# Altium PCB uSD_Module_TYPE2242.PcbDoc
Units mm, origin at the board's own origin, x right, y up, seen from the top; angles counter-clockwise.
Board outline 42 x 21.99 mm, 4 copper layers (Top Layer, Int1 (GND), Int2 (PWR), Bottom Layer), stack 0.77 mm thick; 10 components, 45 nets, 110 pads, 49 vias.
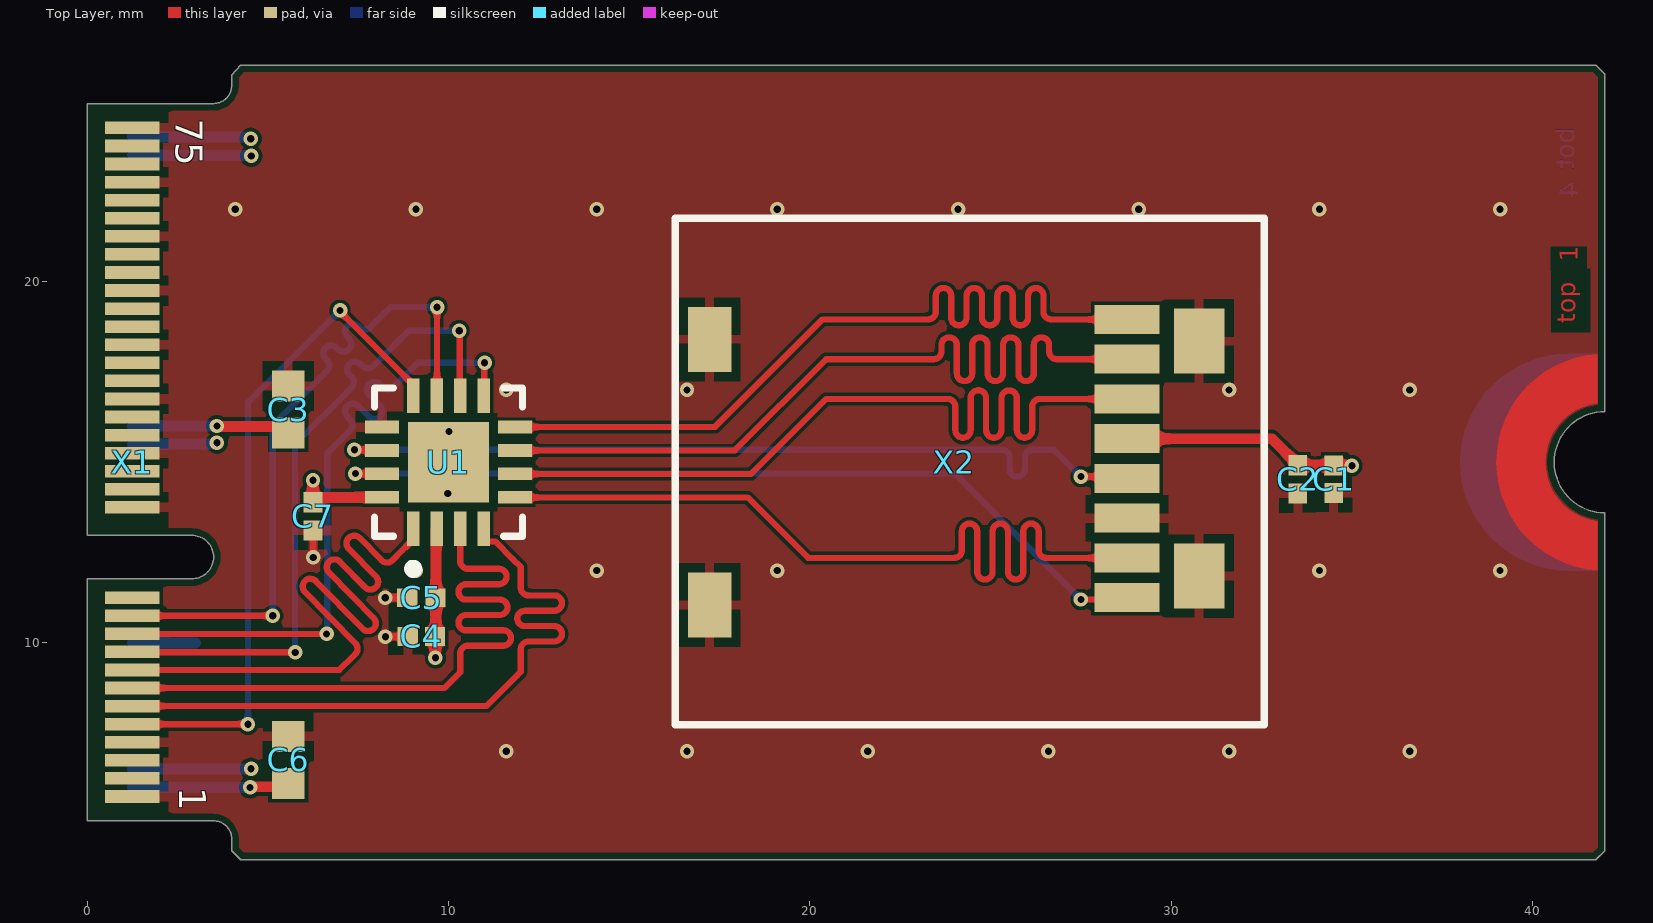
[diagram p0: Top Layer view]
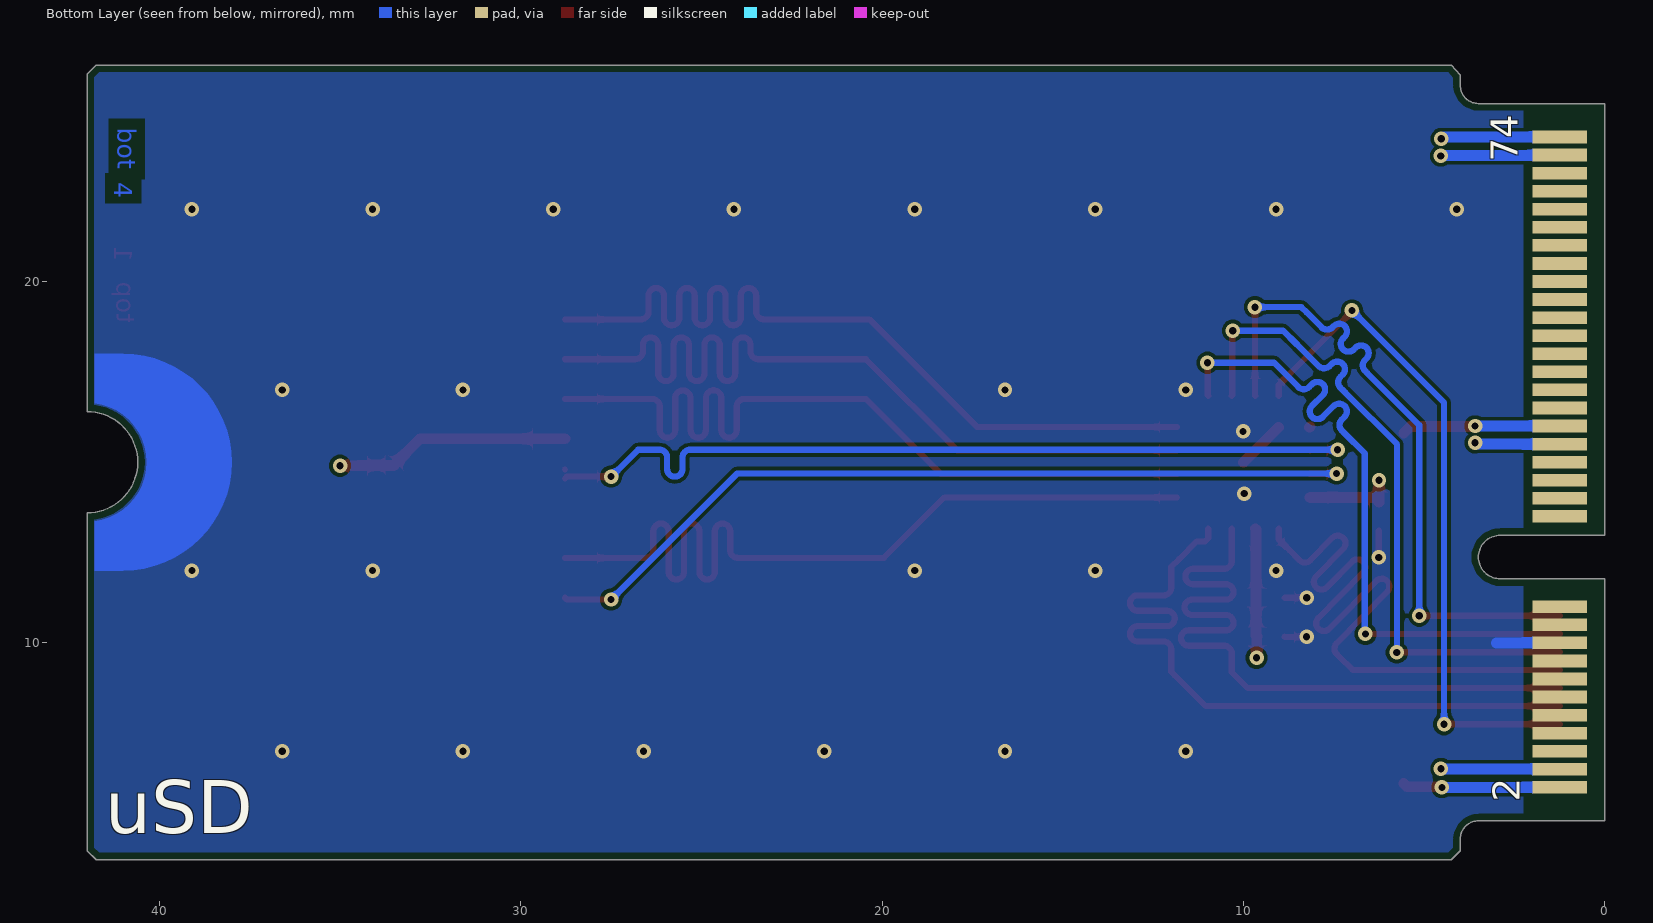
[diagram p1: Bottom Layer view, seen from below]
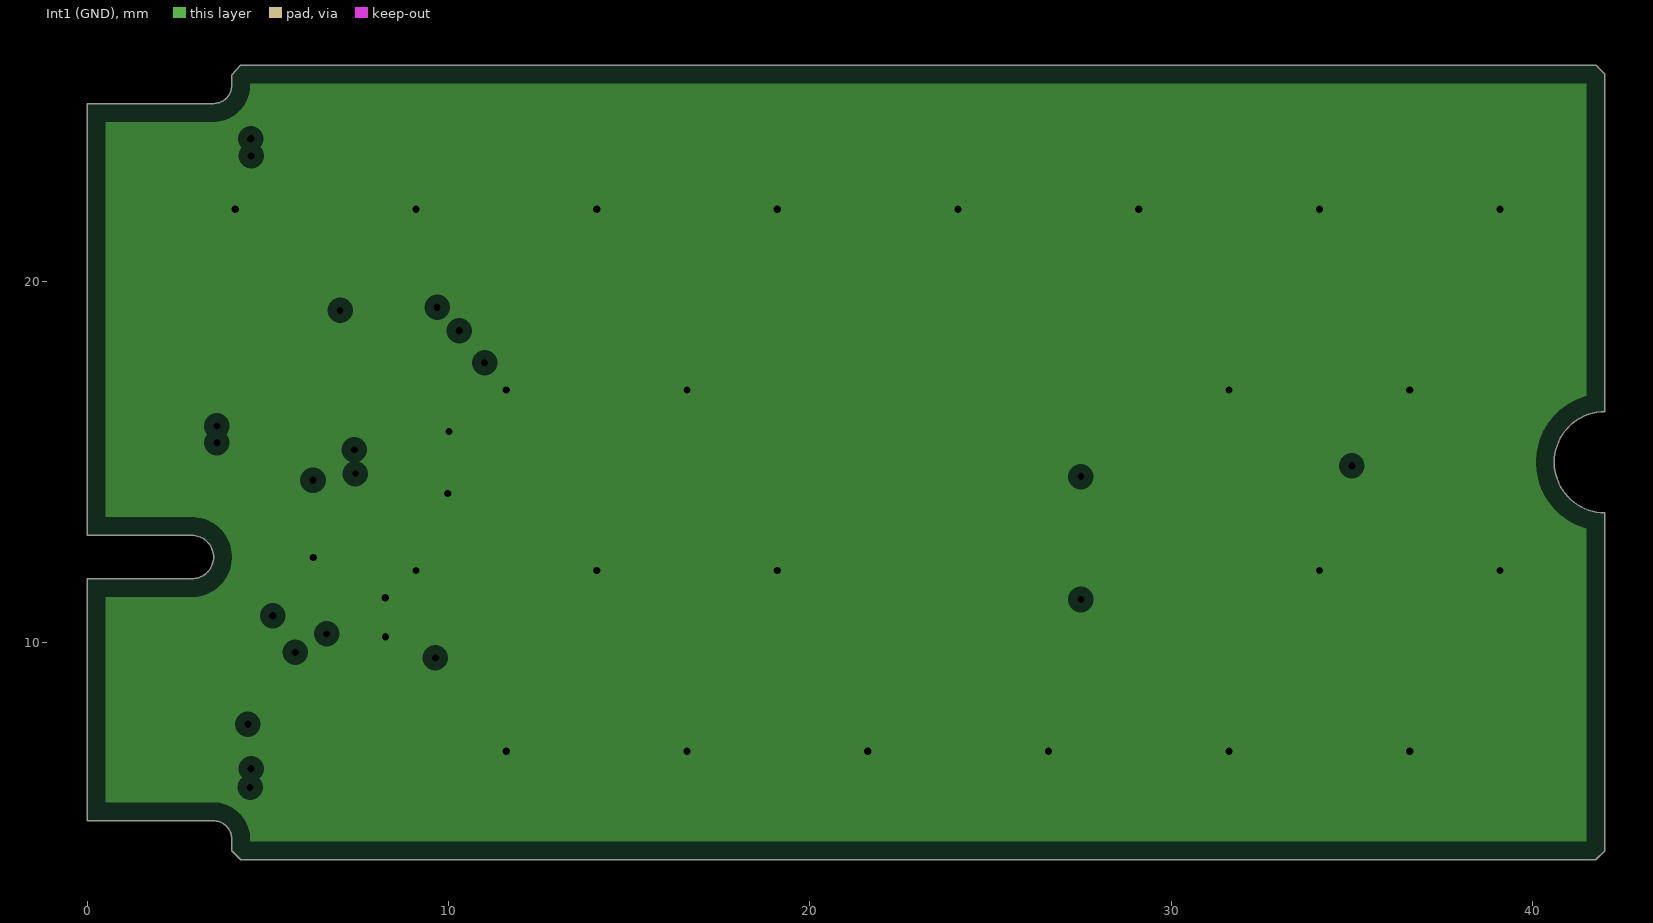
[diagram p2: Int1 (GND), clearances drawn from the general rule]
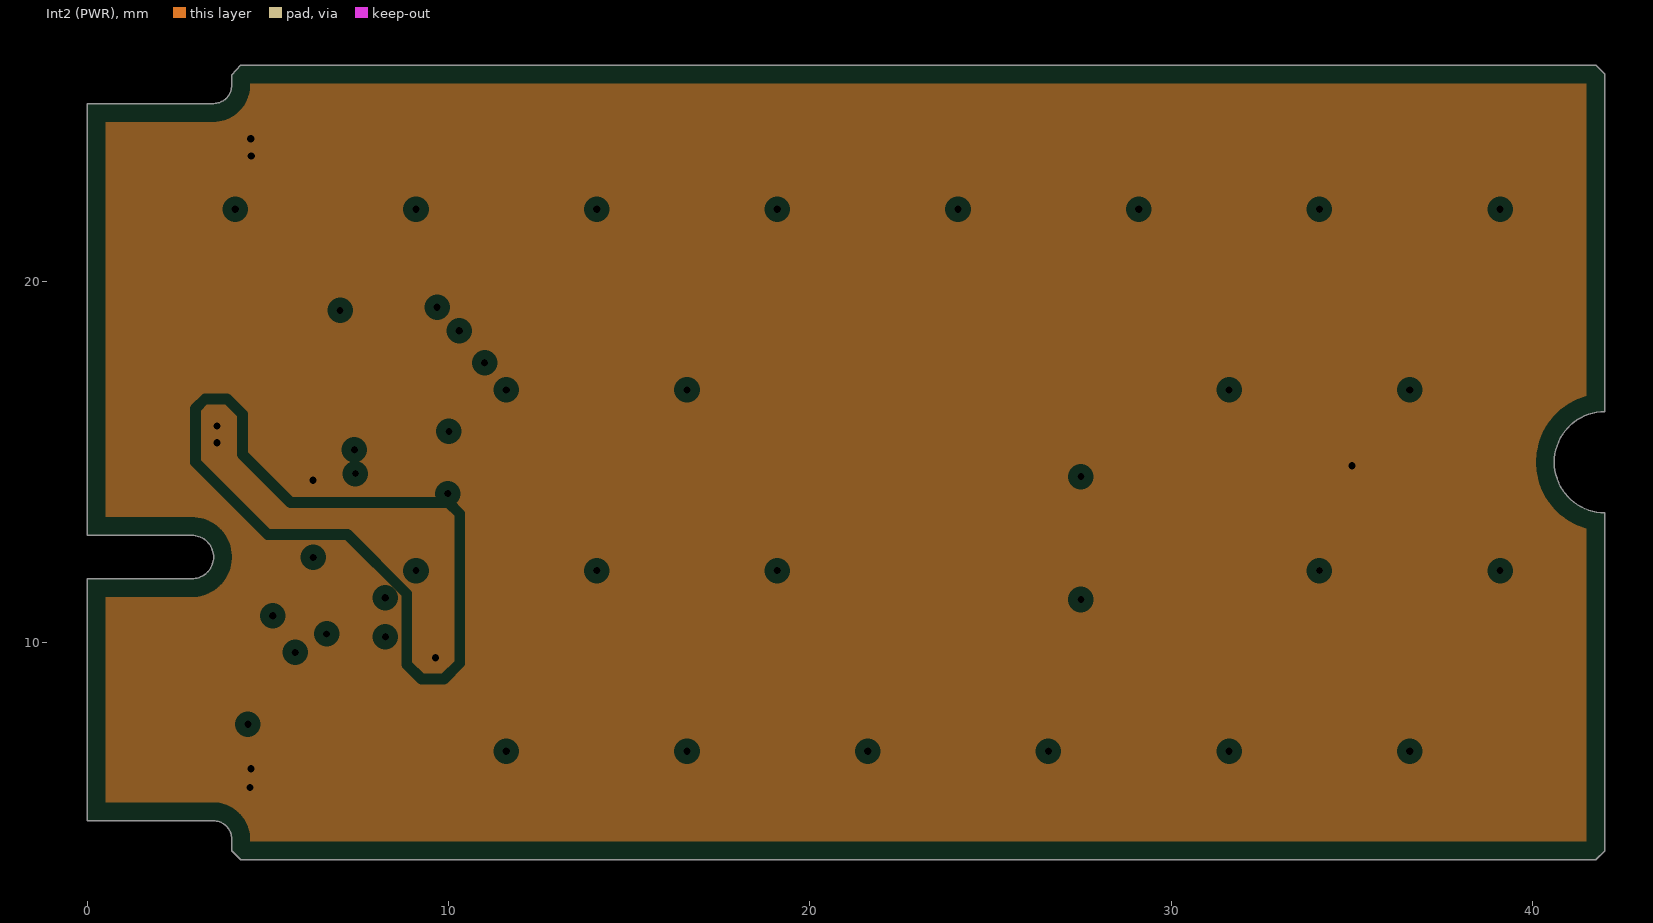
[diagram p3: Int2 (PWR), clearances drawn from the general rule]

## Layer stack, top to bottom
Top Solder: solder mask 0.0254, SM-001, Dk 4
Top Layer: signal copper 0.035
Dielectric 1: prepreg 0.1118, PP-015, Dk 4.3
Int1 (GND): plane copper 0.035, net GND
Dielectric 3: core 0.4064, Core-034, Dk 4.6
Int2 (PWR): plane copper 0.035, net 3V3
Dielectric 5: prepreg 0.1118, PP-015, Dk 4.3
Bottom Layer: signal copper 0.035
Bottom Solder: solder mask 0.0254, SM-001, Dk 4

## Board outline
4,4.25 4,4.575 ccw(c3.5,4.575) 3.5,5.075 0,5.075 0,11.775 2.9,11.775 ccw(c2.9,12.375) 3.5,12.375 ccw(c2.9,12.375) 2.9,12.975 0,12.975 0,24.925 3.5,24.925 ccw(c3.5,25.425) 4,25.425 4,25.713 4.25,25.988 41.75,25.988 42,25.738 42,16.4 ccw(c42,15) 40.6,15 ccw(c42,15) 42,13.6 42,4.25 41.75,4 4.25,4

## Design rules (kind name [scope] priority, off if disabled: settings)
BoardOutlineClearance [All] p1: gap=0.2 ignorepadtopadclearanceinfootprint=FALSE
Clearance [All] p1: gap=0.1 ignorepadtopadclearanceinfootprint=FALSE
DiffPairsRouting DiffPairsRouting_100R [InDifferentialPairClass('DP_100R')] p1: maxlimit=0.15 minlimit=0.15 mostfreqgap=0.15 toplayer_minwidth=0.11 toplayer_maxwidth=0.11 toplayer_prefwidth=0.11 bottomlayer_minwidth=0.11 bottomlayer_maxwidth=0.11 bottomlayer_prefwidth=0.11 impedanceprofiledriven=TRUE impedanceprofileid={D0ED966C-66EA-42B8-8657-787F2A77329B} impedanceprofilevalue=100.000000 maxuncoupledlength=12.7
DiffPairsRouting [All] p2: maxlimit=0.254 minlimit=0.254 mostfreqgap=0.254 toplayer_minwidth=0.381 toplayer_maxwidth=0.381 toplayer_prefwidth=0.381 bottomlayer_minwidth=0.381 bottomlayer_maxwidth=0.381 bottomlayer_prefwidth=0.381 maxuncoupledlength=12.7
MatchedLengths MatchedLengths_1 [InNetClass('S_GP2')] p1: tolerance=1 checknetsindiffpair=FALSE checkdiffpairvsdiffpair=TRUE checkxsignals=TRUE checkothers=TRUE
MatchedLengths [InNetClass('S_GP')] p2: tolerance=1 checknetsindiffpair=FALSE checkdiffpairvsdiffpair=TRUE checkxsignals=TRUE checkothers=TRUE
PlaneClearance [All] p1: clearance=0.254
PlaneConnect [All] p1: pad.planeconnectstyle=Relief pad.reliefexpansion=0.508 pad.reliefentries=4 pad.reliefconductorwidth=0.254 pad.reliefairgap=0.254 via.planeconnectstyle=Direct via.reliefexpansion=0.508 via.reliefentries=4 via.reliefconductorwidth=0.254 via.reliefairgap=0.254
PolygonConnect [All] p1: thpad.connectstyle=Relief thpad.reliefconductorwidth=0.254 thpad.reliefentries=4 thpad.polygonreliefangle="90 Angle" thpad.airgapwidth=0.254 smdpad.connectstyle=Relief smdpad.reliefconductorwidth=0.254 smdpad.reliefentries=4 smdpad.polygonreliefangle="90 Angle" smdpad.airgapwidth=0.254 via.connectstyle=Direct via.reliefconductorwidth=0.254 via.reliefentries=4 via.polygonreliefangle="90 Angle" via.airgapwidth=0.254
RoutingVias [All] p1: holewidth=0.2 width=0.4 viastyle="Through Hole" minholewidth=0.2 minwidth=0.4 maxholewidth=3 maxwidth=6
SolderMaskExpansion [All] p1: expansion=0.102 istentingtop=FALSE
Width Width_50R [InNetClass('SE_50R')] p1: maxlimit=0.172 minlimit=0.172 preferedwidth=0.172 impedanceprofiledriven=TRUE impedanceprofileid={CEA07893-88F1-4413-85C8-7467995CDE0A} impedanceprofilevalue=50.000000 minimp=50.000000 maximp=50.000000 favimp=50.000000
Width [All] p2: maxlimit=4 minlimit=0.1 preferedwidth=0.125
27 further rules are at their usual default settings.

## Classes and differential pairs
component class peripheral: C1 C2 C3 C4 C5 C6 C7 U1 X2
net class S_GP2: NetU1_5 NetU1_6 NetU1_7 NetU1_8 NetU1_14 NetU1_15
differential pair class DP_100R: FMC_GP_D1 FMC_GP_D2 FMC_GP_D3 FMC_GP_D4 FMC_GP_D5 FMC_GP_D6 FMC_GP_D7
net class SE_50R: FMC_GP_S0 FMC_GP_S1 FMC_GP_S2 FMC_GP_S3 FMC_GP_S4 FMC_GP_S5 FMC_GP_S6 NetU1_5 NetU1_6 NetU1_7 NetU1_8 NetU1_14 NetU1_15
net class S_GP: FMC_GP_S0 FMC_GP_S1 FMC_GP_S2 FMC_GP_S3 FMC_GP_S4 FMC_GP_S5 FMC_GP_S6
net class FMC_GP_S[0..7]: FMC_GP_S0 FMC_GP_S1 FMC_GP_S2 FMC_GP_S3 FMC_GP_S4 FMC_GP_S5 FMC_GP_S6 FMC_GP_S7
net class FMC_GP_D_P[0..7]: FMC_GP_D_P0 FMC_GP_D_P1 FMC_GP_D_P2 FMC_GP_D_P3 FMC_GP_D_P4 FMC_GP_D_P5 FMC_GP_D_P6 FMC_GP_D_P7
net class FMC_GP_D_N[0..7]: FMC_GP_D_N0 FMC_GP_D_N1 FMC_GP_D_N2 FMC_GP_D_N3 FMC_GP_D_N4 FMC_GP_D_N5 FMC_GP_D_N6 FMC_GP_D_N7
net class DP_GP: FMC_GP_D_N1 FMC_GP_D_N2 FMC_GP_D_N3 FMC_GP_D_N4 FMC_GP_D_N5 FMC_GP_D_N6 FMC_GP_D_N7 FMC_GP_D_P1 FMC_GP_D_P2 FMC_GP_D_P3 FMC_GP_D_P4 FMC_GP_D_P5 FMC_GP_D_P6 FMC_GP_D_P7
component class connector: X1
differential pair FMC_GP_D7: +FMC_GP_D_P7 -FMC_GP_D_N7
differential pair FMC_GP_D6: +FMC_GP_D_P6 -FMC_GP_D_N6
differential pair FMC_GP_D5: +FMC_GP_D_P5 -FMC_GP_D_N5
differential pair FMC_GP_D4: +FMC_GP_D_P4 -FMC_GP_D_N4
differential pair FMC_GP_D3: +FMC_GP_D_P3 -FMC_GP_D_N3
differential pair FMC_GP_D2: +FMC_GP_D_P2 -FMC_GP_D_N2
differential pair FMC_GP_D1: +FMC_GP_D_P1 -FMC_GP_D_N1

## Components (designator, comment, footprint, x,y, rotation, side; value= is the part's Value field where it differs from the comment)
C1 "1uF" CAPC1005X60X30LL05T10 34.5,14.525 r90 top
C2 "100nF" CAPC1050X55X23LL05T13 33.5,14.525 r90 top
C3 "10uF" CAPC1608X90X35LL15T15 5.565,16.457 r270 top
C4 "1uF" CAPC1005X60X30LL05T10 9.249,10.179 r0 top
C5 "100nF" CAPC1050X55X23LL05T13 9.25,11.25 r0 top
C6 "10uF" CAPC1608X90X35LL15T15 5.565,6.759 r270 top
C7 "100nF" CAPC1050X55X23LL05T13 6.25,13.5 r90 top
U1 "MAX13035EETE+" FP-T1644-4-MFG 10,15 r90 top
X1 "CONN PWR CARD EDGE PCB SLOT MALE" CON-67_0.5MM_PCB_SLOT 1.25,15 r270 top
X2 "ST1W008S4AR1500" ST1W008S4AR1500 24,15 r180 top

## Footprints (in the part's own frame and the unit in brackets; to place one, negate y for a bottom-side part, rotate by r counter-clockwise, add the part's x,y. Pads: shape width x height; smd on the part's side, far side on the other; paste and mask are expansions set on the pad)
CAPC1005X60X30LL05T10 [mm] "Chip Capacitor, 2-Leads, Body 1.00x0.50mm, IPC High Density"
  rect 0.56x0.52 smd: 1(-0.38,0) 2(0.38,0)
  body extent -0.53,-0.28 0.53,0.28, height 0.6
CAPC1050X55X23LL05T13 [mm] "Chip Capacitor, 2-Leads, Body 1.05x0.55mm, IPC High Density"
  rect 0.56x0.52 smd: 1(-0.39,0) 2(0.39,0)
  body extent -0.53,-0.28 0.53,0.28, height 0.55
CAPC1608X90X35LL15T15 [mm] "Chip Capacitor, 2-Leads, Body 1.60x0.81mm, IPC High Density"
  rect 0.85x0.9 smd: 1(-0.65,0) 2(0.65,0)
  body extent -0.88,-0.48 0.87,0.48, height 0.9
CON-67_0.5MM_PCB_SLOT [mm] "Connector 67, 0.5mm pitch - No BOM"
  rect 0.35x1.5 smd: 1(9.25,0) 3(8.75,0) 5(8.25,0) 7(7.75,0) 9(7.25,0) 11(6.75,0) 13(6.25,0) 15(5.75,0) 17(5.25,0) 19(4.75,0) 21(4.25,0) 23(3.75,0) 33(1.25,0) 35(0.75,0) 37(0.25,0) 39(-0.25,0) 41(-0.75,0) 43(-1.25,0) 45(-1.75,0) 47(-2.25,0) 49(-2.75,0) 51(-3.25,0) 53(-3.75,0) 55(-4.25,0) 57(-4.75,0) 59(-5.25,0) 61(-5.75,0) 63(-6.25,0) 65(-6.75,0) 67(-7.25,0) 69(-7.75,0) 71(-8.25,0) 73(-8.75,0) 75(-9.25,0)
  rect 0.35x1.5 smd far side: 2(9,0) 4(8.5,0) 6(8,0) 8(7.5,0) 10(7,0) 12(6.5,0) 14(6,0) 16(5.5,0) 18(5,0) 20(4.5,0) 22(4,0) 32(1.5,0) 34(1,0) 36(0.5,0) 38(0,0) 40(-0.5,0) 42(-1,0) 44(-1.5,0) 46(-2,0) 48(-2.5,0) 50(-3,0) 52(-3.5,0) 54(-4,0) 56(-4.5,0) 58(-5,0) 60(-5.5,0) 62(-6,0) 64(-6.5,0) 66(-7,0) 68(-7.5,0) 70(-8,0) 72(-8.5,0) 74(-9,0)
FP-T1644-4-MFG [mm]
  rect 0.95x0.35 smd paste+0 mask+0: 1(-1.84,0.975) 2(-1.84,0.325) 3(-1.84,-0.325) 4(-1.84,-0.975) 9(1.84,-0.975) 10(1.84,-0.325) 11(1.84,0.325) 12(1.84,0.975)
  rect 0.35x0.95 smd paste+0 mask+0: 5(-0.975,-1.84) 6(-0.325,-1.84) 7(0.325,-1.84) 8(0.975,-1.84) 13(0.975,1.84) 14(0.325,1.84) 15(-0.325,1.84) 16(-0.975,1.84)
  rect 2.23x2.23 smd paste+0 mask+0: 17(0,0)
  silkscreen extent -3.07,-2.05 2.05,2.05, body extent -2.41,-2.41 2.41,2.41, height 0.25
ST1W008S4AR1500 [mm] "CONN MICRO SD CARD HINGED TYPE"
  rect 1.8x0.8 smd: 1(-4.775,-3.95) 2(-4.775,-2.85) 3(-4.775,-1.75) 4(-4.775,-0.65) 5(-4.775,0.45) 6(-4.775,1.55) 7(-4.775,2.65) 8(-4.775,3.75)
  rect 1.2x1.8 smd: 9(6.775,-3.4) 10(6.775,3.95)
  rect 1.4x1.8 smd: 11(-6.775,-3.35) 12(-6.775,3.15)
  silkscreen extent -8.57,-6.75 7.73,7.27, body extent -8.57,-6.75 7.73,7.3, height 1.91

## Part data
C1 C4: library part CMP-2008-02044-1, Case Code (Imperial)=0402, Dielectric=X5R, Dielectric Material=Ceramic, Manufacturer=Kemet, Manufacturer Part Number=C0402C105K9PACTU, Max Operating Temperature=85°C, Min Operating Temperature=-55°C, Package Quantity=1, Supplier Part Number 1=399-4873-6-ND, Tolerance=10%, Voltage=6.3V, Case/Package=0402, Category="Ceramic Capacitors", ComponentLink1Description=https://datasheet.ciiva.com/28645/1789732-28645392.pdf?src-supplier=Element14, ComponentLink1URL=https://datasheet.ciiva.com/28645/1789732-28645392.pdf?src-supplier=Element14, ComponentLink2Description=https://datasheet.ciiva.com/11786/0900766b8116eb59-11786028.pdf?src-supplier=RSComponents, ComponentLink2URL=https://datasheet.ciiva.com/11786/0900766b8116eb59-11786028.pdf?src-supplier=RSComponents, ComponentLink3Description=https://datasheet.ciiva.com/7747/kem-c1006-x5r-smd-7747445.pdf?src-supplier=Element14, ComponentLink3URL=https://datasheet.ciiva.com/7747/kem-c1006-x5r-smd-7747445.pdf?src-supplier=Element14, ComponentLink4Description=https://datasheet.ciiva.com/7747/40889-7747623.pdf?src-supplier=Element14, ComponentLink4URL=https://datasheet.ciiva.com/7747/40889-7747623.pdf?src-supplier=Element14, ComponentLink5Description=https://datasheet.ciiva.com/18192/getdatasheetpartid-127800-18192427.pdf?src-supplier=Verical, ComponentLink5URL=https://datasheet.ciiva.com/18192/getdatasheetpartid-127800-18192427.pdf?src-supplier=Verical, Depth=0.5mm, Height=0.5mm, Lead Free="Lead Free", Lead Pitch=0.3mm, Length=1mm, Mount="Surface Mount", Number of Pins=2, Packaging="Tape and Reel", Part Number=C0402C105K9PACTU, Pricing 1="1=0.10000, 10=0.02600, 100=0.01180, 500=0.00844, 1000=0.00662, 2500=0.00602, 5000=0.00554 (USD)", Radiation Hardening=No, REACH SVHC="No SVHC", RoHS=Yes, Stock 1=1737568, Supplier 1=Digi-Key, Termination=SMD/SMT, Thickness=0.022inch, Voltage Rating=6.3V, Voltage Rating (DC)=6.3V, Width=0.02inch
C2 C5 C7: library part CMP-2000-05439-1, "Chip Capacitor, 100 nF, +/- 10%, 16 V, -55 to 125 degC, 0402 (1005 Metric), RoHS, Tape and Reel", Case Code (Imperial)=0402, Case Code (Metric)=1005, Dielectric=X7R, Manufacturer="Samsung Electro-Mechanics", Manufacturer Part Number=CL05B104KO5NNNC, Max Operating Temperature=125°C, Min Operating Temperature=-55°C, Package Quantity=1, Rated Voltage=16V, Supplier Part Number 1=1276-1001-1-ND, Tolerance=10%, Tolerance (%)=±10%, Case Size/Dimension=0402, Case/Package=0402, Category="Ceramic Capacitors", ComponentLink1Description=https://datasheet.ciiva.com/26920/getdatasheetpartid-359683-26920169.pdf?src-supplier=Verical, ComponentLink1URL=https://datasheet.ciiva.com/26920/getdatasheetpartid-359683-26920169.pdf?src-supplier=Verical, ComponentLink2Description=https://datasheet.ciiva.com/29198/458718-da-01-en-vs-kondensator-0402-29198423.pdf?src-supplier=Conrad, ComponentLink2URL=https://datasheet.ciiva.com/29198/458718-da-01-en-vs-kondensator-0402-29198423.pdf?src-supplier=Conrad, ComponentLink3Description=https://datasheet.ciiva.com/16208/cl05b104kq5nnnc-16208343.pdf?src-supplier=Future+Electronics, ComponentLink3URL=https://datasheet.ciiva.com/16208/cl05b104kq5nnnc-16208343.pdf?src-supplier=Future+Electronics, ComponentLink4Description=https://datasheet.ciiva.com/26309/mlcc-catalogdownload2013-eng-26309003.pdf?src-supplier=Distrelec, ComponentLink4URL=https://datasheet.ciiva.com/26309/mlcc-catalogdownload2013-eng-26309003.pdf?src-supplier=Distrelec, Contact Plating=Tin, Datasheet URL=https://datasheet.ciiva.com/29198/458718-da-01-en-vs-kondensator-0402-29198423.pdf, Datasheet Version=Nov-10, Depth=0.5mm, Height=0.5mm, Lead Free="Lead Free", Length=1mm, Manufacturer URL=http://www.samsungsem.com/global/index.jsp, Material=Ceramic, Mount="Surface Mount", Packaging="Tape and Reel", Pricing 1="1=0.10000, 10=0.02800, 50=0.01520, 100=0.01240, 500=0.00886, 1000=0.00696, 2500=0.00632, 5000=0.00582 (USD)", Radiation Hardening=No, RoHS=Yes, Stock 1=18886859, Supplier 1=Digi-Key, Thickness=0.022inch, Voltage=16V, Voltage Rating=16V, Voltage Rating (DC)=16V, Width=0.02inch
C3 C6: library part CMP-2006-04476-1, Case Code (Imperial)=0603, Case Code (Metric)=1608, Dielectric=X5R, Dielectric Material=Ceramic, Manufacturer="AVX Interconnect / Elco", Manufacturer Part Number=06036D106MAT2A, Max Operating Temperature=85°C, Min Operating Temperature=-55°C, Package Quantity=1, Supplier Part Number 1=478-5318-1-ND, Tolerance=20%, Voltage=6.3V, Case/Package=0603, Category="Ceramic Capacitors", ComponentLink1Description=https://datasheet.ciiva.com/153/cx5r-153301.pdf?src-supplier=Digi-Key, ComponentLink1URL=https://datasheet.ciiva.com/153/cx5r-153301.pdf?src-supplier=Digi-Key, ComponentLink2Description=https://datasheet.ciiva.com/1458/1796776-1458117.pdf?src-supplier=Element14, ComponentLink2URL=https://datasheet.ciiva.com/1458/1796776-1458117.pdf?src-supplier=Element14, ComponentLink3Description=https://datasheet.ciiva.com/153/cx5r-153302.pdf?src-supplier=Digi-Key, ComponentLink3URL=https://datasheet.ciiva.com/153/cx5r-153302.pdf?src-supplier=Digi-Key, ComponentLink4Description=https://datasheet.ciiva.com/153/cx5r-153303.pdf?src-supplier=Digi-Key, ComponentLink4URL=https://datasheet.ciiva.com/153/cx5r-153303.pdf?src-supplier=Digi-Key, ComponentLink5Description=https://datasheet.ciiva.com/5422/cx5r-33896-5422935.pdf?src-supplier=Mouser, ComponentLink5URL=https://datasheet.ciiva.com/5422/cx5r-33896-5422935.pdf?src-supplier=Mouser, ComponentLink6Description=https://datasheet.ciiva.com/16538/cx5r-16538025.pdf?src-supplier=Avnet+Asia, ComponentLink6URL=https://datasheet.ciiva.com/16538/cx5r-16538025.pdf?src-supplier=Avnet+Asia, ComponentLink7Description=https://datasheet.ciiva.com/2987/cx5r-2987866.pdf?src-supplier=Avnet, ComponentLink7URL=https://datasheet.ciiva.com/2987/cx5r-2987866.pdf?src-supplier=Avnet, ComponentLink8Description=https://datasheet.ciiva.com/14591/70001028-14591754.pdf?src-supplier=Allied+Electronics, ComponentLink8URL=https://datasheet.ciiva.com/14591/70001028-14591754.pdf?src-supplier=Allied+Electronics, ComponentLink9Description=https://datasheet.ciiva.com/2987/cx5r-2987867.pdf?src-supplier=Avnet, ComponentLink9URL=https://datasheet.ciiva.com/2987/cx5r-2987867.pdf?src-supplier=Avnet, ComponentLink10Description=https://datasheet.ciiva.com/16201/cx5r-16201627.pdf?src-supplier=Future+Electronics, ComponentLink10URL=https://datasheet.ciiva.com/16201/cx5r-16201627.pdf?src-supplier=Future+Electronics, Construction=Flat, Contact Plating=Tin,Matte, Depth=0.81mm, Height=0.9mm, Lead Free="Lead Free", Length=1.6mm, Mount="Surface Mount,PCB", Number of Pins=2, Packaging="Tape and Reel", Part Number=06036D106MAT2A, Pricing 1="1=0.24000, 10=0.16500, 50=0.09900, 100=0.08360, 500=0.05720, 1000=0.05060 (USD)", Radiation Hardening=No, REACH SVHC="No SVHC", RoHS=Yes, RoHS Compliant=Yes, Series=-, Stock 1=1934840, Supplier 1=Digi-Key, Termination=SMD/SMT, Thickness=0.035inch, Voltage Rating=6.3V, Voltage Rating (DC)=6.3V, Width=0.032inch
U1: library part CMP-05703-000003-1, "IC TRNSLTR BIDIRECTIONAL 16TQFN", High Level Output Current=-20uA, Low Level Output Current=20uA, Manufacturer=Maxim, Max Junction Temp=+150°C, Max Operating Temperature=85°C, Max Power Dissipation=2W, Max Supply Voltage=3.6V, Min Operating Temperature=-40°C, Min Supply Voltage=1.62V, Nominal Supply Current=6-16uA, Package=T1644-4, Package Quantity=75, Supplier Part Number 1=MAX13035EETE+-ND, Supply Current=2uA, Temperature="-40°C to +85°C", Temperature Range High=+85°C, Automotive=No, Category=IC, ComponentLink1Description=https://datasheet.ciiva.com/1901/max13030e-max13035e-1901479.pdf?src-supplier=Digi-Key, ComponentLink1URL=https://datasheet.ciiva.com/1901/max13030e-max13035e-1901479.pdf?src-supplier=Digi-Key, ComponentLink2Description=Datasheet, ComponentLink2URL=https://datasheets.maximintegrated.com/en/ds/MAX13030E-MAX13035E.pdf, ComponentLink3Description=https://datasheet.ciiva.com/17370/max13030e-max13035e-17370199.pdf?src-supplier=Avnet+Europe, ComponentLink3URL=https://datasheet.ciiva.com/17370/max13030e-max13035e-17370199.pdf?src-supplier=Avnet+Europe, ComponentLink4Description=https://datasheet.ciiva.com/14287/max13030e-max13035e-14287387.pdf?src-supplier=Avnet, ComponentLink4URL=https://datasheet.ciiva.com/14287/max13030e-max13035e-14287387.pdf?src-supplier=Avnet, Data Rate=100Mbits/s, Device Class L1="Integrated Circuits (ICs)", Device Class L2="Logic ICs", Device Class L3="Voltage Level Shifters", Digikey Description="IC TRNSLTR BIDIRECTIONAL 16TQFN", Footprint Url=https://pdfserv.maximintegrated.com/land_patterns/90-0070.PDF, Height=0.8mm, Ipc Land Pattern Name=QFN65P400X400X75-16, Lead Free=Yes, Length=4mm, Logic Function=Translator, Logic Function Desc=Non-Inverting, Manufacturer Part Number=MAX13035EETE+, Mount="Surface Mount", Mouser Description="Translation - Voltage Levels 6Ch High-Speed", Number of Bits=6, Number of Channels=6, Number of Circuits=1, Number Of Inputs=6, Number Of Outputs=6, Number of Pins=16, Octopart=https://octopart.com/max13035eete%2B-maxim+integrated-39866737, Packaging=Rail/Tube, Pricing 1="1=9.01000, 10=8.13600, 25=7.75760, 100=6.73590, 250=6.43312, 500=5.86552, 1000=5.10867, 2500=4.91946, 5000=4.81950 (USD)", Propagation Delay=6.5ns, Radiation Hardening=No, REACH SVHC=Unknown, RoHS=TRUE, RoHS Compliant=Yes, Series=-, Standoff Height=0mm, Stock 1=1404, Supplier 1=Digi-Key, Temperature Range Low=-40°C, Turn-On Delay Time=6.5ns, V A Max=3.6V, V A Min=2.2V, V B Max=3.2V, V B Min=1.62V, Width=4mm
X1: library part CMP-01224-1, "Mates with 2199119-4 - No BOM", Card Thickness=0.8mm, Card Type="Non Specified - Dual Edge", Gender=Male, Mates with=2199119-4, Number of Positions=67, Pitch=0.5mm
X2: library part CMP-00689-1, "Memory Card Connectors MICRO SD HINGE TYPE OPEN on cover", Current Rating=500mA, Manufacturer="JAE Electronics", Package Quantity=1500, Supplier Part Number=670-2921-1-ND, Voltage Rating=10V, ComponentLink1Description=cardconn-microsd-pg-v2-2-6934295.pdf, ComponentLink1URL=https://datasheet.ciiva.com/6934/cardconn-microsd-pg-v2-2-6934295.pdf, Connector Type=Connector, Contact Material="Copper Alloy", Contact Plating=Gold, Gender=Female, Height=2mm, Housing Material=Resin, Lead Free="Lead Free", Manufacturer Part Number=ST1W008S4AR1500, Mating Cycles=10000, Mount="Surface Mount", Number of Contacts=8, Number of Positions=8, Number of Rows=1, Orientation="Right Angle", Packaging="Tape and Reel", Pitch=1.1mm, Supplier=Digi-Key, Termination=SMD/SMT

## Via types
v1: diameter 0.4, hole 0.2, Top Layer to Bottom Layer, tented both sides, 49 vias

## Nets (pads, with @x,y where several pads share a name; then routed paths per layer and width w, separated by ;. In a path a pad name is that pad's centre, name@x,y a point inside that pad or via, vN(x,y) a via of type N, cw(c..) or ccw(c..) an arc to the next point about the centre after c; other vN are vias at no path point)
3V3: C1.2 C2.2 C6.2 C7.2 U1.16 X1.2 X1.4 X1.72 X1.74 X2.4 | length 23.3
  Top Layer w0.3: v1(4.511,6) 4.53,6.019 5.475,6.019 C6.2 ; C7.2 C7.2@6.25,14.025 ; v1(6.25,14.5) C7.2@6.25,14.025 ; U1.16 C7.2@6.25,14.025 ; X2.4 32.785,15.65 33.5,14.935 C2.2 33.505,14.91 34.495,14.91 C1.2 34.502,14.903 34.998,14.903 v1(35,14.9)
  Bottom Layer w0.3: X1.4 1.26,6.51 4.527,6.51 v1(4.536,6.519) ; X1.72 1.262,23.488 4.53,23.488 v1(4.543,23.475) ; X1.74 4.451,24 4.498,23.952 v1(4.526,23.952) ; X1.2 v1(4.511,6)
FMC_12V: X1.38
FMC_ADJ: C3.2 C4.2 C5.2 U1.2 X1.40 X1.42 | length 10.4
  Top Layer w0.3: v1(3.593,16.001) 3.607,15.987 5.386,15.987 C3.2 ; v1(9.639,9.586) 9.634,9.59 9.634,10.174 C4.2 9.652,10.202 9.652,13.137 U1.2
  Bottom Layer w0.3: X1.40 3.529,15.5 3.566,15.537 v1(3.593,15.537) ; X1.42@1.251,16.001 v1@3.592,16.001
FMC_GP_D_N0: X1.5
FMC_GP_D_N1: X1.37
FMC_GP_D_N2: X1.43
FMC_GP_D_N3: X1.49
FMC_GP_D_N4: X1.55
FMC_GP_D_N5: X1.61
FMC_GP_D_N6: X1.67
FMC_GP_D_N7: X1.73
FMC_GP_D_P0: X1.3
FMC_GP_D_P1: X1.35
FMC_GP_D_P2: X1.41
FMC_GP_D_P3: X1.47
FMC_GP_D_P4: X1.53
FMC_GP_D_P5: X1.59
FMC_GP_D_P6: X1.65
FMC_GP_D_P7: X1.71
FMC_GP_S0: U1.12 X1.9 | length 18.9
  Top Layer w0.172: X1.9 v1(4.449,7.75) ; v1(7,19.2) 7,19.165 9.025,17.14 U1.12
  Bottom Layer w0.172: v1(4.449,7.75) 4.449,16.649 v1(7,19.2)
FMC_GP_S1: U1.4 X1.11 | length 19.7
  Top Layer w0.172: X1.11 11.05,8.25 11.9,9.1 12,9.2 12,9.824 cw(c12.213,9.824) 12.213,10.037 12.926,10.037 ccw(c12.926,10.25) 12.926,10.463 12.115,10.463 cw(c12.115,10.676) 12.115,10.889 12.926,10.889 ccw(c12.926,11.101) 12.926,11.314 12.213,11.314 cw(c12.213,11.527) 12,11.527 12,12.1 11.781,12.319 11.293,12.807 11.064,12.807 10.975,12.896 U1.4
FMC_GP_S2: U1.3 X1.13 | length 20.3
  Top Layer w0.172: X1.13 7,8.75 9.5,8.75 9.888,8.75 10.325,9.187 10.325,9.196 10.325,9.708 cw(c10.538,9.708) 10.538,9.921 11.516,9.921 ccw(c11.516,10.134) 11.516,10.347 10.487,10.347 cw(c10.487,10.559) 10.487,10.772 11.419,10.772 ccw(c11.419,10.985) 11.419,11.198 10.487,11.198 cw(c10.487,11.411) 10.487,11.624 11.397,11.624 ccw(c11.397,11.836) 11.397,12.049 10.538,12.049 cw(c10.538,12.262) 10.325,12.262 10.325,12.585 U1.3
FMC_GP_S3: U1.1 X1.15 | length 20
  Top Layer w0.172: X1.15 6.982,9.25 7.359,9.627 7.421,9.689 ccw(c7.271,9.839) 7.422,9.988 6.024,11.412 cw(c6.176,11.561) 6.027,11.713 cw(c6.176,11.561) 6.328,11.71 7.625,10.389 ccw(c7.777,10.539) 7.926,10.387 ccw(c7.777,10.539) 7.929,10.688 6.692,11.948 cw(c6.843,12.097) 6.694,12.249 cw(c6.843,12.097) 6.995,12.246 7.689,11.54 ccw(c7.841,11.689) 7.99,11.537 ccw(c7.841,11.689) 7.992,11.838 7.239,12.605 cw(c7.391,12.754) 7.242,12.906 cw(c7.391,12.754) 7.543,12.903 8.148,12.287 ccw(c8.3,12.436) 8.451,12.286 8.725,12.56 9.025,12.86 U1.1
FMC_GP_S4: U1.10 X1.17 | length 18.6
  Top Layer w0.172: X1.17 1.257,9.743 5.75,9.743 v1(5.757,9.736) ; v1(10.295,18.639) 10.31,18.624 10.31,16.855 U1.10
  Bottom Layer w0.172: v1(5.757,9.736) 5.75,9.743 5.75,15.49 7.186,16.926 7.247,16.986 7.319,17.058 ccw(c7.168,17.209) 7.316,17.362 7.259,17.417 cw(c7.406,17.571) 7.253,17.718 cw(c7.406,17.571) 7.554,17.724 7.624,17.657 ccw(c7.771,17.81) 7.922,17.66 8.473,18.21 8.534,18.271 8.903,18.639 v1(10.295,18.639)
FMC_GP_S5: U1.9 X1.19 | length 18.7
  Top Layer w0.172: X1.19 1.251,10.249 v1(6.627,10.248) v1(6.627,10.248) ; U1.9 10.988,16.853 10.988,17.738 v1(11,17.75)
  Bottom Layer w0.172: v1(6.627,10.248) 6.644,10.265 6.644,15.242 7.219,15.816 7.28,15.877 ccw(c7.129,16.028) 7.28,16.178 7.202,16.256 cw(c7.352,16.407) 7.202,16.557 cw(c7.352,16.407) 7.503,16.557 7.806,16.254 ccw(c7.957,16.404) 8.107,16.254 ccw(c7.957,16.404) 8.107,16.555 7.804,16.858 cw(c7.954,17.009) 7.804,17.159 cw(c7.954,17.009) 8.105,17.159 8.183,17.081 ccw(c8.333,17.232) 8.484,17.081 9.152,17.75 v1(11,17.75)
FMC_GP_S6: U1.11 X1.21 | length 18.8
  Top Layer w0.172: X1.21 v1(5.136,10.75) v1@5.136,10.812 ; U1.11 9.68,16.845 9.68,19.285 v1(9.686,19.29)
  Bottom Layer w0.172: v1(5.136,10.75) 5.136,16.026 6.576,17.467 6.637,17.527 ccw(c6.486,17.678) 6.637,17.828 6.597,17.868 cw(c6.748,18.018) 6.597,18.169 cw(c6.748,18.018) 6.898,18.169 6.946,18.121 ccw(c7.096,18.272) 7.247,18.121 ccw(c7.096,18.272) 7.247,18.422 7.199,18.47 cw(c7.35,18.62) 7.199,18.771 cw(c7.35,18.62) 7.5,18.771 7.54,18.731 ccw(c7.69,18.882) 7.841,18.731 8.255,19.145 8.4,19.29 v1(9.686,19.29)
FMC_GP_S7: X1.23
GND: C1.1 C2.1 C3.1 C4.1 C5.1 C6.1 C7.1 U1.13 U1.17 X1.1 X1.7 X1.18 X1.33 X1.39 X1.45 X1.51 X1.57 X1.63 X1.69 X1.75 X2.6 X2.9 X2.10 X2.11 X2.12 | length 5.1
  Top Layer w0.172: C7.1 6.258,13.102 v1(6.258,12.364) ; v1(8.25,11.25) C5.1 ; v1(8.254,10.166) 8.857,10.166 C4.1
  Top Layer w0.3: U1.13 U1.13@8.17,15.965 ; U1.17@9.035,15.965 U1.17
  Bottom Layer w0.3: X1.18 3,10
  other v1: 11.6,7 16.6,7 21.6,7 26.6,7 31.6,7 36.6,7 9.1,12 14.1,12 19.1,12 34.1,12 39.1,12 9.979,14.131 10.012,15.851 11.6,17 16.6,17 31.6,17 36.6,17 4.1,22 9.1,22 14.1,22 19.1,22 24.1,22 29.1,22 34.1,22 39.1,22
I2C_SCL: X1.60
I2C_SDA: X1.58
I2S_CLK: X1.8
I2S_IN: X1.14
I2S_OUT: X1.12
I2S_WS: X1.10
nALERT: X1.62
NetU1_5: U1.5 X2.7 | length 24.6
  Top Layer w0.172: U1.5 18.275,14.025 19.95,12.35 23.906,12.35 23.992,12.35 ccw(c23.992,12.563) 24.205,12.563 24.205,13.087 cw(c24.418,13.087) 24.63,13.087 24.63,11.965 ccw(c24.843,11.965) 25.056,11.965 25.056,13.087 cw(c25.269,13.087) 25.482,13.087 25.482,11.965 ccw(c25.695,11.965) 25.907,11.965 25.907,13.087 cw(c26.12,13.087) 26.333,13.087 26.333,12.563 ccw(c26.546,12.563) 26.546,12.35 27.2,12.35 X2.7
NetU1_6: U1.6 X2.3 | length 24.1
  Top Layer w0.172: U1.6 18.375,14.675 20.45,16.75 23.3,16.75 23.812,16.75 cw(c23.812,16.537) 24.024,16.537 24.024,15.888 ccw(c24.237,15.888) 24.45,15.888 24.45,16.778 cw(c24.663,16.778) 24.876,16.778 24.876,15.888 ccw(c25.089,15.888) 25.301,15.888 25.301,16.772 cw(c25.514,16.772) 25.727,16.772 25.727,15.888 ccw(c25.94,15.888) 26.153,15.888 26.153,16.537 cw(c26.366,16.537) 26.366,16.75 27.1,16.75 X2.3
NetU1_7: U1.7 X2.2 | length 25
  Top Layer w0.172: U1.7 17.925,15.325 20.45,17.85 23.343,17.85 23.429,17.85 ccw(c23.429,18.063) 23.642,18.063 23.642,18.241 cw(c23.854,18.241) 24.067,18.241 24.067,17.456 ccw(c24.28,17.456) 24.493,17.456 24.493,18.241 cw(c24.706,18.241) 24.919,18.241 24.919,17.456 ccw(c25.131,17.456) 25.344,17.456 25.344,18.241 cw(c25.557,18.241) 25.77,18.241 25.77,17.456 ccw(c25.983,17.456) 26.196,17.456 26.196,18.241 cw(c26.408,18.241) 26.621,18.241 26.621,18.063 ccw(c26.834,18.063) 26.834,17.85 27.2,17.85 X2.2
NetU1_8: U1.8 X2.1 | length 24.6
  Top Layer w0.172: U1.8 17.375,15.975 20.35,18.95 23.186,18.95 23.272,18.95 ccw(c23.272,19.163) 23.485,19.163 23.485,19.608 cw(c23.697,19.608) 23.91,19.608 23.91,19 ccw(c24.123,19) 24.336,19 24.336,19.608 cw(c24.549,19.608) 24.762,19.608 24.762,19 ccw(c24.974,19) 25.187,19 25.187,19.608 cw(c25.4,19.608) 25.613,19.608 25.613,19 ccw(c25.826,19) 26.039,19 26.039,19.608 cw(c26.251,19.608) 26.464,19.608 26.464,19.163 ccw(c26.677,19.163) 26.677,18.95 27.3,18.95 X2.1
NetU1_14: U1.14 X2.5 | length 23.6
  Top Layer w0.172: v1(7.396,15.345) 7.406,15.335 8.15,15.335 U1.14 ; v1(27.5,14.6) 28.725,14.6 X2.5 ; X2.5@28.776,14.799 X2.5@28.775,14.8
  Bottom Layer w0.172: v1(7.396,15.345) 24.8,15.345 25.312,15.345 cw(c25.312,15.132) 25.524,15.132 25.524,14.812 ccw(c25.737,14.812) 25.95,14.812 25.95,15.132 cw(c26.163,15.132) 26.163,15.345 26.755,15.345 v1(27.5,14.6)
NetU1_15: U1.15 X2.8 | length 23.6
  Top Layer w0.172: v1(7.423,14.684) 7.427,14.679 8.156,14.679 U1.15 ; v1(27.5,11.2) 28.725,11.2 X2.8
  Bottom Layer w0.172: v1(7.423,14.684) 24.016,14.684 v1(27.5,11.2)
nLED1: X1.6
nLED2: X1.16
UART_RX: X1.32
UART_TX: X1.22
pads on no net: X1.20 X1.34 X1.36 X1.44 X1.46 X1.48 X1.50 X1.52 X1.54 X1.56 X1.64 X1.66 X1.68 X1.70

## Polygon pours and split planes (outlines as drawn)
GND on Bottom Layer "NONET_L-01_P-001" (solid, pour order 0): 0,26 0,4 42,4 42,26
GND on Top Layer "NONET_L-01_P-001" (solid, pour order 1): 0,26 0,4 42,4 42,26
3V3 on Int2 (PWR) (split plane): 41.49,16.839 41.445,16.828 41.269,16.765 41.099,16.685 40.939,16.588 40.788,16.477 40.649,16.351 40.523,16.212 40.412,16.061 40.315,15.901 40.235,15.731 40.172,15.555 40.126,15.373 40.099,15.187 40.09,15.003 40.09,15 40.09,14.997 40.099,14.813 40.126,14.627 40.172,14.445 40.235,14.269 40.315,14.099 40.412,13.939 40.523,13.788 40.649,13.649 40.788,13.523 40.939,13.412 41.099,13.315 41.269,13.235 41.445,13.172 41.49,13.161 41.49,4.51 4.51,4.51 4.51,4.575 4.51,4.584 4.502,4.707 4.476,4.836 4.433,4.962 4.375,5.08 4.301,5.19 4.214,5.289 4.115,5.376 4.005,5.45 3.887,5.508 3.761,5.551 3.632,5.577 3.509,5.585 3.5,5.585 0.51,5.585 0.51,11.265 2.9,11.265 2.902,11.265 3.045,11.274 3.187,11.302 3.325,11.349 3.455,11.413 3.576,11.494 3.685,11.59 3.781,11.699 3.862,11.82 3.926,11.95 3.973,12.088 4.001,12.23 4.01,12.373 4.01,12.375 4.01,12.377 4.001,12.52 3.973,12.662 3.926,12.8 3.862,12.93 3.781,13.051 3.685,13.16 3.576,13.256 3.455,13.337 3.325,13.401 3.187,13.448 3.045,13.476 2.902,13.485 2.9,13.485 0.51,13.485 0.51,24.415 3.5,24.415 3.509,24.415 3.632,24.423 3.761,24.449 3.887,24.492 4.005,24.55 4.115,24.624 4.214,24.711 4.301,24.81 4.375,24.92 4.433,25.038 4.476,25.164 4.502,25.293 4.51,25.416 4.51,25.425 4.51,25.477 41.49,25.477
FMC_ADJ on Int2 (PWR) (split plane): 4.148,16.265 4.148,15.215 4.153,15.176 4.162,15.155 4.168,15.14 4.192,15.108 5.524,13.776 5.556,13.752 5.592,13.737 5.631,13.732 9.938,13.732 10.16,13.51 10.16,9.501 9.81,9.151 9.313,9.151 8.997,9.467 8.997,11.359 8.991,11.398 8.976,11.434 8.952,11.466 7.31,13.108 7.278,13.132 7.263,13.139 7.242,13.148 7.203,13.153 5.061,13.153 3.151,15.063 3.151,16 3.151,16.421 3.332,16.602 3.811,16.602
GND on Int1 (GND) (split plane): 41.49,16.839 41.445,16.828 41.269,16.765 41.099,16.685 40.939,16.588 40.788,16.477 40.649,16.351 40.523,16.212 40.412,16.061 40.315,15.901 40.235,15.731 40.172,15.555 40.126,15.373 40.099,15.187 40.09,15.003 40.09,15 40.09,14.997 40.099,14.813 40.126,14.627 40.172,14.445 40.235,14.269 40.315,14.099 40.412,13.939 40.523,13.788 40.649,13.649 40.788,13.523 40.939,13.412 41.099,13.315 41.269,13.235 41.445,13.172 41.49,13.161 41.49,4.51 4.51,4.51 4.51,4.575 4.51,4.584 4.502,4.707 4.476,4.836 4.433,4.962 4.375,5.08 4.301,5.19 4.214,5.289 4.115,5.376 4.005,5.45 3.887,5.508 3.761,5.551 3.632,5.577 3.509,5.585 3.5,5.585 0.51,5.585 0.51,11.265 2.9,11.265 2.902,11.265 3.045,11.274 3.187,11.302 3.325,11.349 3.455,11.413 3.576,11.494 3.685,11.59 3.781,11.699 3.862,11.82 3.926,11.95 3.973,12.088 4.001,12.23 4.01,12.373 4.01,12.375 4.01,12.377 4.001,12.52 3.973,12.662 3.926,12.8 3.862,12.93 3.781,13.051 3.685,13.16 3.576,13.256 3.455,13.337 3.325,13.401 3.187,13.448 3.045,13.476 2.902,13.485 2.9,13.485 0.51,13.485 0.51,24.415 3.5,24.415 3.509,24.415 3.632,24.423 3.761,24.449 3.887,24.492 4.005,24.55 4.115,24.624 4.214,24.711 4.301,24.81 4.375,24.92 4.433,25.038 4.476,25.164 4.502,25.293 4.51,25.416 4.51,25.425 4.51,25.477 41.49,25.477

## Other copper
Top Layer:
  region net GND: 41.79,12.007 cw(c42,15) 41.79,17.993 41.79,16.637 ccw(c42,15) 41.79,13.363
  pour cut-out: 2.254,13.321 0.321,13.321 0,13 0,12.992 2.256,12.992
  text "1" at 41.25,20.55 h0.5 r90
  text "top" at 41.183,18.85 h0.5 r90
Bottom Layer:
  region net GND: 41,12 cw(c41,15) 41,18 41.79,18 41.79,16.637 ccw(c42,15) 41.79,13.363 41.79,12
  pour cut-out: 2.254,25 2.254,4 0,4 0,25
  text "bot" at 41.15,24.25 h0.5 r90
  text "4" at 41.25,22.75 h0.5 r90
Int1 (GND) (plane layer: these items are gaps in the copper):
  text "2" at 41.25,21.05 h0.5 r90
Int2 (PWR) (plane layer: these items are gaps in the copper):
  lines w0.3: 3,15 4.999,13.001 7.203,13.001 8.845,11.359 8.845,9.405 9.25,9 9.873,9 10.311,9.438 10.311,13.573 10.001,13.883 5.631,13.883 4.299,15.215 4.299,16.328 3.874,16.753 3.269,16.753 3,16.484 3,16 3,15
  text "3" at 41.25,21.75 h0.5 r90

## Silkscreen, mask and mechanical layers (free items; w line width, h text height)
Bottom Overlay:
  text "uSD" at 41.5,4.25 h2.5
Top Solder:
  region: 42,12 cw(c42,15) 42,18
Bottom Solder:
  region: 41,12 cw(c41,15) 41,18 42,18 42,12
Mechanical 4:
  the board outline again, w0
Mechanical 6:
  lines w0.1: 29,4 29.75,4 30,4.25 ; 29,26 29.75,26 30,25.75 ; 29.75,0 30,0.25 30,4.25 ; 29.75,30 30,29.75 30,25.75 ; 4,4.25 4,0.25 4.25,0 41.75,0 42,0.25 42,4.25 ; 4,4.25 4,4.575 ccw(c3.5,4.575) 3.5,5.075 0,5.075 0,11.775 2.9,11.775 ccw(c2.9,12.375) 3.5,12.375 ccw(c2.9,12.375) 2.9,12.975 0,12.975 0,24.925 3.5,24.925 ccw(c3.5,25.425) 4,25.425 4,25.75 ; 4,4.25 4.25,4 5,4 41,4 41.75,4 42,4.25 ; 4,25.75 4,29.75 4.25,30 41.75,30 42,29.75 42,25.75 ; 4,25.75 4.25,26 5,26 41,26 41.75,26 42,25.75 ; 27,15 cw(c30,15) 30,18 ; 27,15 ccw(c30,15) 30,12 ; 27,15 27,15 ; 30,4.25 30,13.6 ; 30,12 30,13.6 ; 30,12 29,12 cw(c29,15) 26,15 cw(c29,15) 29,18 30,18 ; 30,13.6 cw(c30,15) 28.6,15 cw(c30,15) 30,16.4 ; 30,16.4 30,25.75 ; 30,16.4 30,18 ; 39,15 ccw(c42,15) 42,12 ; 39,15 cw(c42,15) 42,18 ; 39,15 39,15 ; 42,4.25 42,13.6 ; 42,12 42,13.6 ; 42,12 41,12 cw(c41,15) 38,15 cw(c41,15) 41,18 42,18 ; 42,13.6 cw(c42,15) 40.6,15 cw(c42,15) 42,16.4 ; 42,16.4 42,18 ; 42,16.4 42,25.75
  text "TYPE2230" at 21.35,4.35 h1
  text "TYPE2242" at 33.35,4.35 h1
  text "TYPE3030" at 21.35,0.35 h1
  text "TYPE3042" at 33.35,0.35 h1

## Text inside footprints (layer, text, board x,y; h text height)
X1: Top Overlay "1" at 2.55,6 h0.75 r270; Top Overlay "75" at 2.45,24.5 h0.75 r270; Mechanical 1 "Board Edge" at -1.65,19 h0.8 r270; Mechanical 1 "All pads hard gold finished" at 0.05,29.8 h0.5 r270; Mechanical 1 "20-degree chamfered border from this line" at -5.15,5 h0.5 r270; Mechanical 1 "Final Board Thickness: 0.8 +-0.08mm" at -3.85,24.3 h0.8 r270; Bottom Overlay "74" at 2.415,23.318 h0.75 r270; Bottom Overlay "2" at 2.35,5.6 h0.75 r270